# Altium PCB PCB1.PcbDoc
Units mm, origin at the board's own origin, x right, y up, seen from the top; angles counter-clockwise.
Board outline 20 x 20 mm, 2 copper layers (Top Layer, Bottom Layer), stack 1.671 mm thick; 5 components, 4 nets, 10 pads, 1 vias.
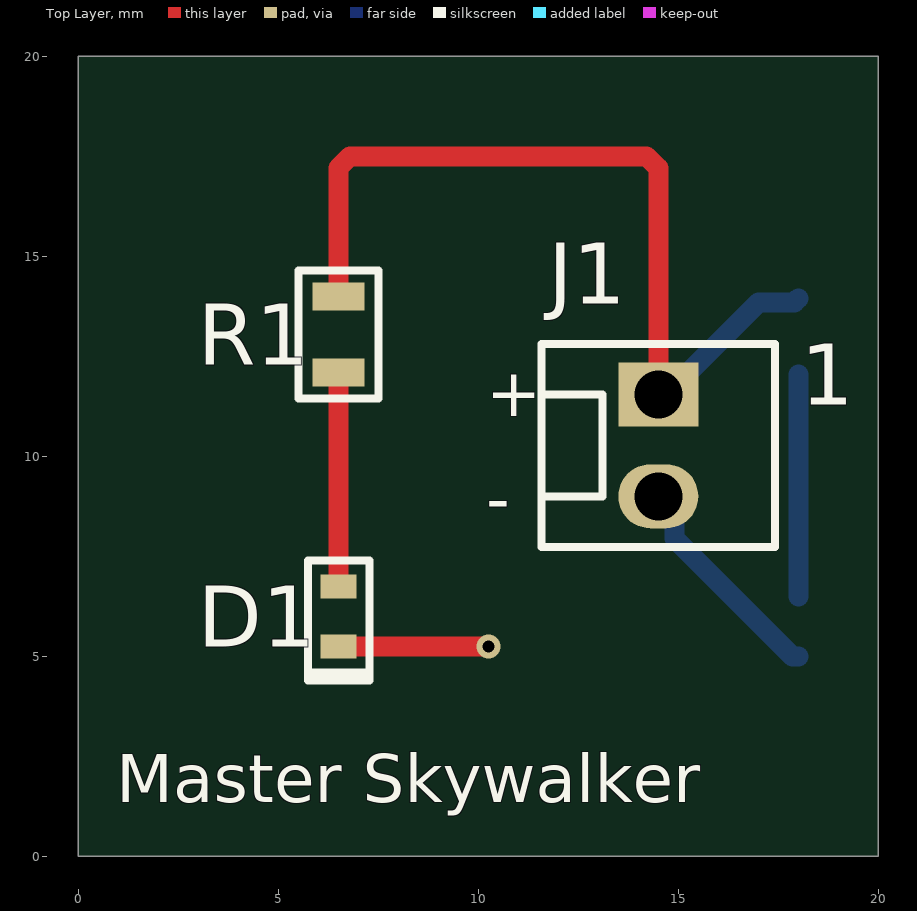
[diagram p0: Top Layer view]
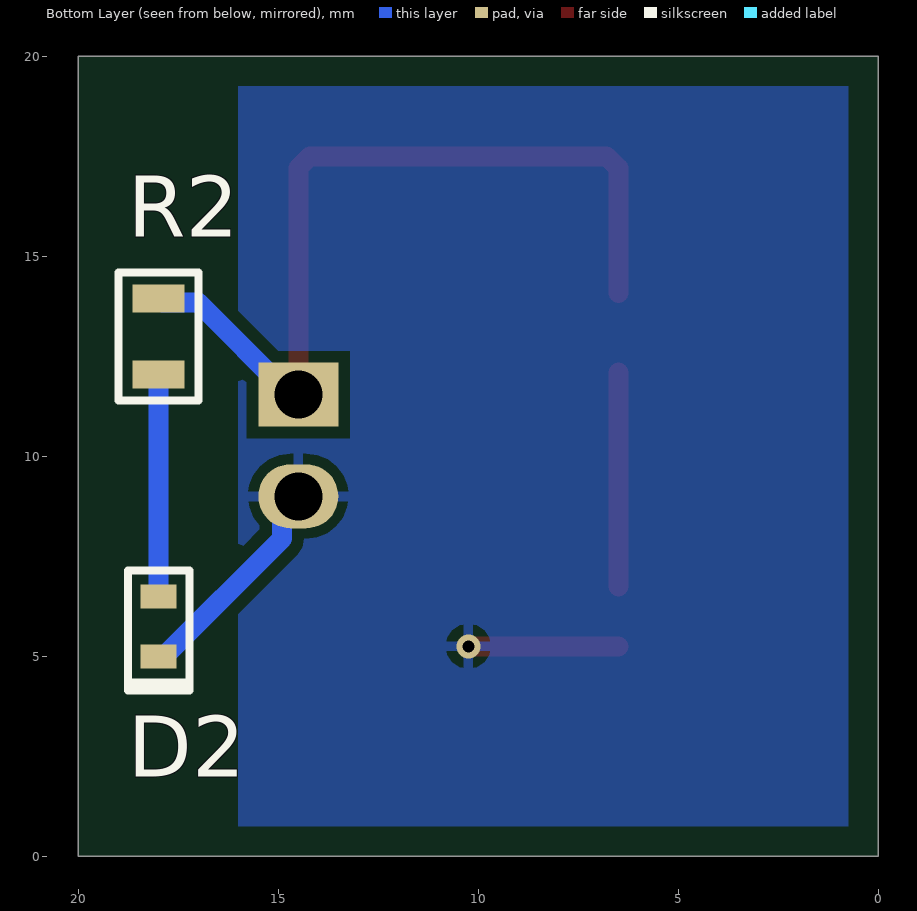
[diagram p1: Bottom Layer view, seen from below]
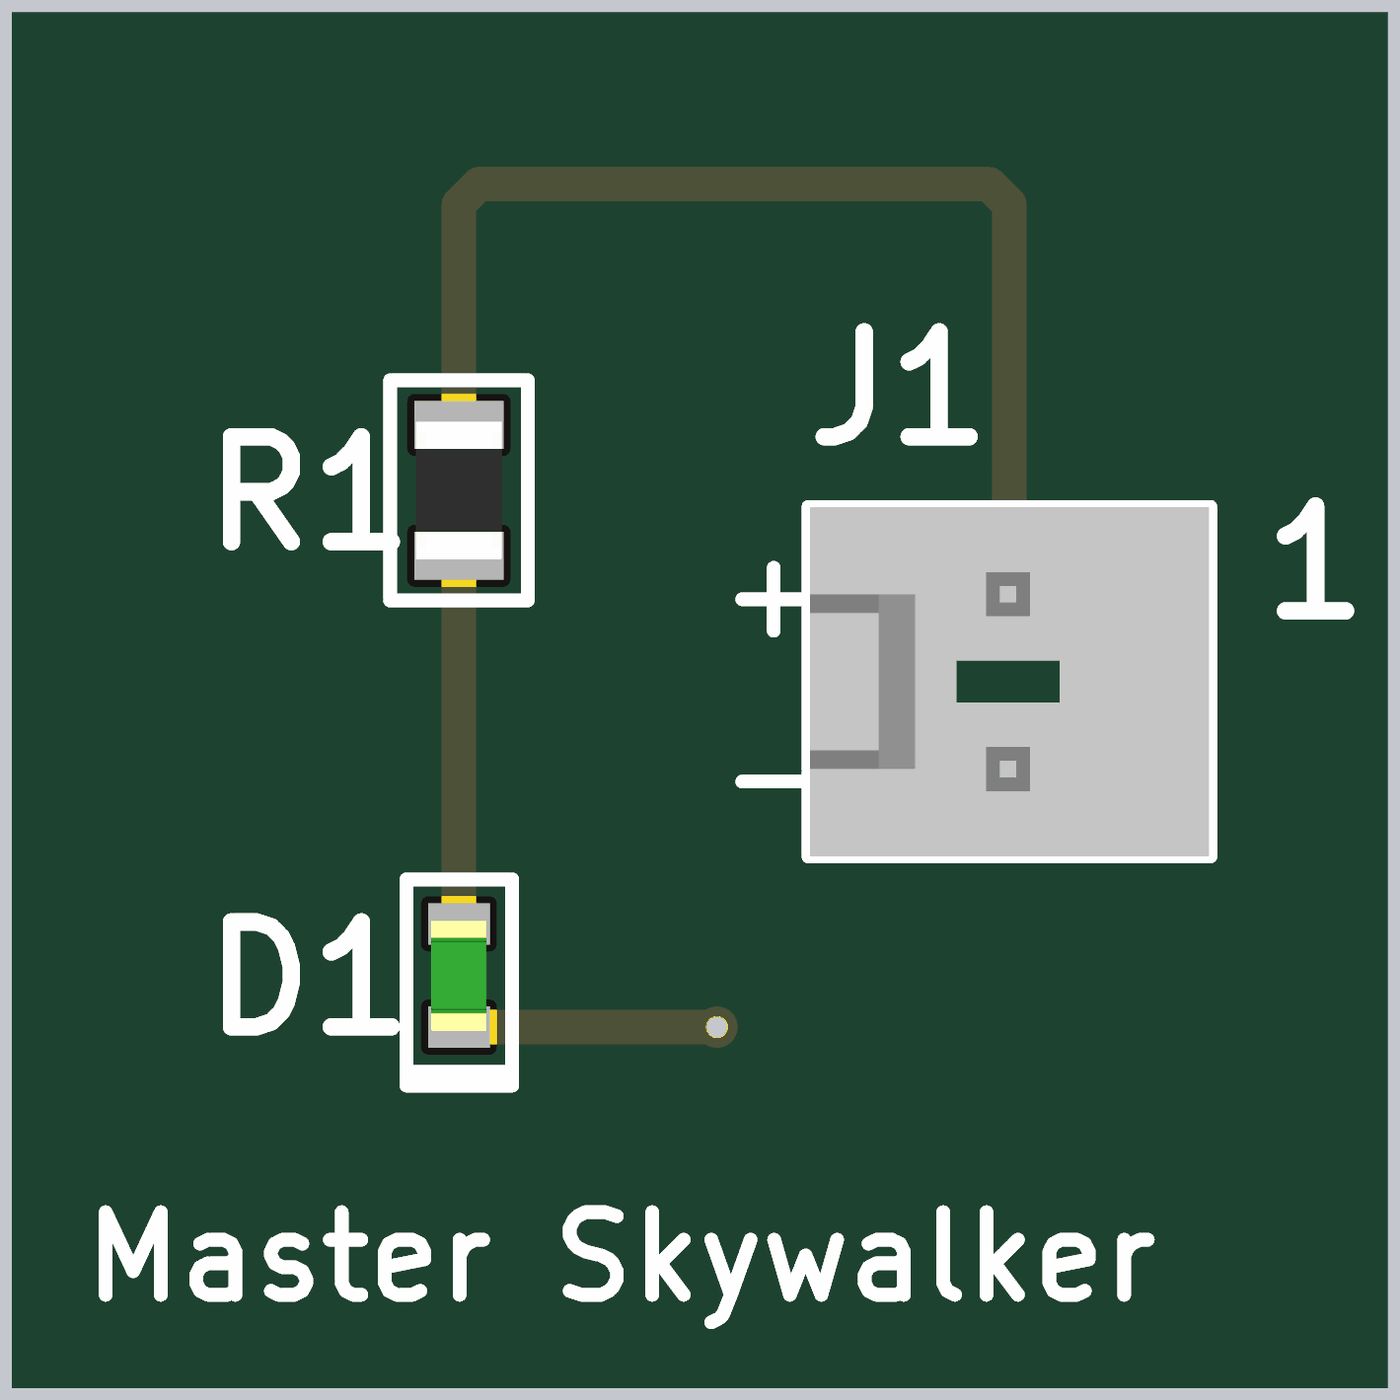
[diagram p2: 3D render of the assembled board from above, using the file's embedded part models]

## Layer stack, top to bottom
Top Solder: solder mask 0.0102, Solder Resist, Dk 3.5
Top Layer: signal copper 0.0356
Dielectric 1: dielectric 1.6, FR-4, Dk 4.8
Bottom Layer: signal copper 0.0356
Bottom Solder: solder mask 0.0102, Solder Resist, Dk 3.5

## Board outline
20,20 0,20 0,0 20,0

## Design rules (kind name [scope] priority, off if disabled: settings)
Clearance [All] p1: gap=0.3 ignorepadtopadclearanceinfootprint=FALSE
PolygonConnect [All] p1: connectstyle=Relief reliefconductorwidth=0.254 reliefentries=4 polygonreliefangle="90 Angle" airgapwidth=0.254
RoutingVias [All] p1: holewidth=0.3 width=0.6 viastyle="Through Hole" minholewidth=0.3 minwidth=0.6 maxholewidth=0.3 maxwidth=0.6
SilkToSolderMaskClearance [IsPad] p1: minsilkscreentomaskgap=0.1 clearancetoexposedcopper=TRUE
SolderMaskExpansion [All] p1: expansion=0.102 istentingtop=FALSE
Width [All] p1: maxlimit=1 minlimit=0.3 preferedwidth=0.5
29 further rules are at their usual default settings.

## Components (designator, comment, footprint, x,y, rotation, side; value= is the part's Value field where it differs from the comment)
D1 "Green" RESISTOR 6.5,6 r90 top
D2 "Green" RESISTOR 18,5.75 r90 bottom
J1 "1x2 Header" "HEADER 1X2" 14.5,11.54 r0 top
R1 "360R" "RESISTOR - DUPLICATE" 6.5,13.05 r90 top
R2 "360R" "RESISTOR - DUPLICATE" 18,13 r90 bottom

## Footprints (in the part's own frame and the unit in brackets; to place one, negate y for a bottom-side part, rotate by r counter-clockwise, add the part's x,y. Pads: shape width x height; smd on the part's side, far side on the other; paste and mask are expansions set on the pad)
"HEADER 1X2" [mm]
  rect 2x1.6 hole 1.2: 1(0,0)
  oval 2x1.6 hole 1.2: 2(0,-2.54)
  silkscreen extent -2.92,-3.81 2.92,1.27, body extent -2.9,-3.81 2.9,1.27, height 11.77
RESISTOR [mm]
  rect 0.6x0.9 smd: 1(-0.75,0) 2(0.75,0)
  silkscreen extent -1.6,-0.77 1.4,0.76, body extent -0.8,-0.4 0.8,0.4, height 0.36
"RESISTOR - DUPLICATE" [mm]
  rect 0.7x1.3 smd: 1(-0.95,0) 2(0.95,0)
  silkscreen extent -1.6,-1 1.6,1, body extent -1,-0.62 1,0.63, height 0.6

## Part data
D1 D2: library part LTST-C191KGKT, "LED Uni-Color Green 574nm 2-Pin Chip LED T/R", Case Code (Imperial)=0603, Case Code (Metric)=1608, Forward Current=30mA, Forward Voltage=2V, Lens Color=Colorless, Manufacturer="Vishay Lite-On", Max Operating Temperature=85°C, Max Power Dissipation=75mW, Min Operating Temperature=-55°C, Package Quantity=1, Reverse Voltage=5V, Supplier Part Number 1=160-1446-1-ND, Test Current=20mA, Case/Package=0603, Category=LEDs, Category1=Optoelectronics, Color=Green, ComponentLink1Description=https://datasheet.ciiva.com/2109/ltst-c191kgkt-2109973.pdf?src-supplier=Digi-Key, ComponentLink1URL=https://datasheet.ciiva.com/2109/ltst-c191kgkt-2109973.pdf?src-supplier=Digi-Key, Depth=0.8mm, Dominant Wavelength=571nm, Height=0.55mm, Illumination Color=Green, Lead Free="Lead Free", Length=1.6mm, Lens Style=Rectangular,Colorless, Lens Transparency=Clear, Luminous Intensity=35mcd, Manufacturer Part Number=LTST-C191KGKT, Mount="Surface Mount", Number of Elements=1, Number of LEDs=1, Number of Pins=2, Packaging="Tape and Reel", Power Dissipation=75mW, Power Rating=75mW, Pricing 1="1=0.26000, 10=0.14100, 100=0.06560, 500=0.06060, 1000=0.04747, 2000=0.04646 (USD)", Radiation Hardening=No, RoHS=Yes, RoHS Compliant=Yes, Stock 1=920505, Supplier 1=Digi-Key, Viewing Angle=130°, Wavelength=574nm, Width=0.8mm
J1: library part 22-27-2021, "MOLEX - 22-27-2021 - WIRE-BOARD CONNECTOR HEADER 2 POSITION, 2.54MM", Color=White, Contact Resistance=20mR, Current Rating=4A, Flammability Rating="UL94 V-0", Housing Color=Natural, Insulation Resistance=50GR, Manufacturer=Molex, Max Operating Temperature=75°C, Min Operating Temperature=0°C, Package Quantity=24000, Supplier Part Number 1=WM4111-ND, Voltage Rating=500V, Voltage Rating (AC)=250V, Approvals=UL,CSA, Category="Headers and Wire Housings", Category1=Connectors, ComponentLink1Description=https://datasheet.ciiva.com/15217/getdatasheetpartid-163454-15217683.pdf?src-supplier=Verical, ComponentLink1URL=https://datasheet.ciiva.com/15217/getdatasheetpartid-163454-15217683.pdf?src-supplier=Verical, ComponentLink2Description=https://datasheet.ciiva.com/9468/0022272021-pcb-headers-9468403.pdf?src-supplier=Avnet, ComponentLink2URL=https://datasheet.ciiva.com/9468/0022272021-pcb-headers-9468403.pdf?src-supplier=Avnet, ComponentLink3Description=https://datasheet.ciiva.com/30177/113940022272021-pcb-headers-30177601.pdf?src-supplier=Onlinecomponents.com, ComponentLink3URL=https://datasheet.ciiva.com/30177/113940022272021-pcb-headers-30177601.pdf?src-supplier=Onlinecomponents.com, ComponentLink4Description=https://datasheet.ciiva.com/11746/0900766b804624e4-11746551.pdf?src-supplier=RSComponents, ComponentLink4URL=https://datasheet.ciiva.com/11746/0900766b804624e4-11746551.pdf?src-supplier=RSComponents, ComponentLink5Description=https://datasheet.ciiva.com/5154/0022272021-pcb-headers-227458-5154933.pdf?src-supplier=Mouser, ComponentLink5URL=https://datasheet.ciiva.com/5154/0022272021-pcb-headers-227458-5154933.pdf?src-supplier=Mouser, ComponentLink6Description=https://datasheet.ciiva.com/19462/879254-19462349.pdf?src-supplier=Jameco, ComponentLink6URL=https://datasheet.ciiva.com/19462/879254-19462349.pdf?src-supplier=Jameco, ComponentLink7Description=https://datasheet.ciiva.com/20207/22-0838e-20207111.pdf?src-supplier=Rapid+Electronics, ComponentLink7URL=https://datasheet.ciiva.com/20207/22-0838e-20207111.pdf?src-supplier=Rapid+Electronics, ComponentLink8Description=https://datasheet.ciiva.com/25908/0022272021-pcb-headers-25908245.pdf?src-supplier=Avnet+Europe, ComponentLink8URL=https://datasheet.ciiva.com/25908/0022272021-pcb-headers-25908245.pdf?src-supplier=Avnet+Europe, Contact Gender=Male, Contact Material=Tin, Contact Plating=Tin, Contact Type=-, Depth=5.8mm, Gender=Male, Height=11.7mm, Housing Material=Nylon, Lead Free="Lead Free", Lead Pitch=2.54mm, Length=10.16mm, Manufacturer Part Number=22-27-2021, Material=Nylon, Max Current Rating=4A, Mount="Through Hole", Number of Circuits=2, Number of Contacts=2, Number of Positions=2, Number of Rows=1, Orientation=Straight, Packaging=Bulk, Pitch=2.54mm, Pricing 1="1=0.26000, 10=0.21200, 100=0.15580, 1000=0.12390, 5000=0.10620, 10000=0.09912 (USD)", Radiation Hardening=No, REACH SVHC=Unknown, RoHS=Yes, RoHS Compliant=Yes, Series=6410, Stock 1=33075, Supplier 1=Digi-Key, Termination="Through Hole", Voltage Rating (DC)=250V, Weight=0.00769oz, Working Voltage=250V
R1 R2: library part CRCW0805360RFKEAHP, "RES SMD 360 OHM 1% 1/2W 0805", Case/Package=0805, Manufacturer="Vishay Dale", Max Operating Temperature=155°C, Max Power Dissipation=500mW, Min Operating Temperature=-55°C, Package Quantity=5000, Resistor Type="Thick Film", Supplier Part Number 1=CRCW0805360RFKEAHP-ND, Temperature Coefficient=100ppm/°C, Tolerance=1%, Category="Chip SMD Resistors", Category1=Resistors, ComponentLink1Description=https://datasheet.ciiva.com/2581/crcwhpe3-2581493.pdf?src-supplier=Digi-Key, ComponentLink1URL=https://datasheet.ciiva.com/2581/crcwhpe3-2581493.pdf?src-supplier=Digi-Key, ComponentLink2Description=https://datasheet.ciiva.com/8898/crcwhpe3-8898911.pdf?src-supplier=Avnet, ComponentLink2URL=https://datasheet.ciiva.com/8898/crcwhpe3-8898911.pdf?src-supplier=Avnet, Contact Plating=Tin, Features="Automotive AEC-Q200", Height=0.024inch, Lead Free="Lead Free", Length=0.079inch, Manufacturer Part Number=CRCW0805360RFKEAHP, Number of Terminations=2, Packaging="Tape and Reel", Pricing 1="5000=0.03019, 10000=0.02818 (USD)", Radiation Hardening=No, Resistance=360R, RoHS=Yes, RoHS Compliant=Yes, Series=CRCW-HP, Stock 1=5000, Supplier 1=Digi-Key, Width=0.049inch

## Via types
v1: diameter 0.6, hole 0.3, Top Layer to Bottom Layer, tented both sides, 1 vias

## Nets (pads, with @x,y where several pads share a name; then routed paths per layer and width w, separated by ;. In a path a pad name is that pad's centre, name@x,y a point inside that pad or via, vN(x,y) a via of type N, cw(c..) or ccw(c..) an arc to the next point about the centre after c; other vN are vias at no path point)
+3V: J1.1 R1.2 R2.2 | length 21.5
  Top Layer w0.5: R1.2@6.5,14.077 6.5,17.207 6.793,17.5 14.207,17.5 14.5,17.207 J1.1
  Bottom Layer w0.5: J1.1 14.7,11.54 17.01,13.85 17.9,13.85 R2.2
Diode1: D1.2 R1.1 | length 5.3
  Top Layer w0.5: D1.2 R1.1
Diode2: D2.2 R2.1 | length 5.5
  Bottom Layer w0.5: D2.2 R2.1
GND: D1.1 D2.1 J1.2 | length 9.3
  Top Layer w0.5: D1.1 v1(10.25,5.25)
  Bottom Layer w0.5: J1.2 14.91,8.59 14.91,7.94 17.85,5 D2.1

## Polygon pours and split planes (outlines as drawn)
GND on Bottom Layer "GND_L02_P009" (solid, pour order 9): 0.75,0.75 16,0.75 16,19.25 0.75,19.25
GND on Bottom Layer "GND_L02_P007" (solid, pour order 7): -7,18

## Silkscreen, mask and mechanical layers (free items; w line width, h text height)
Top Overlay:
  text "+" at 10.2,11 h1.2
  text "-" at 10.2,8.35 h1.2
  text "Master Skywalker" at 0.95,1.35 h1.2
Board Outline:
  the board outline again, w0.1

## Text inside footprints (layer, text, board x,y; h text height)
J1: Top Overlay "1" at 18.056,11.286 h1.52